# Altium PCB FT231X_BRK.PcbDoc
Units mm, origin at the board's own origin, x right, y up, seen from the top; angles counter-clockwise.
Board outline 18.8 x 29 mm, 2 copper layers (Top Layer, Bottom Layer); 19 components, 22 nets, 79 pads, 27 vias.
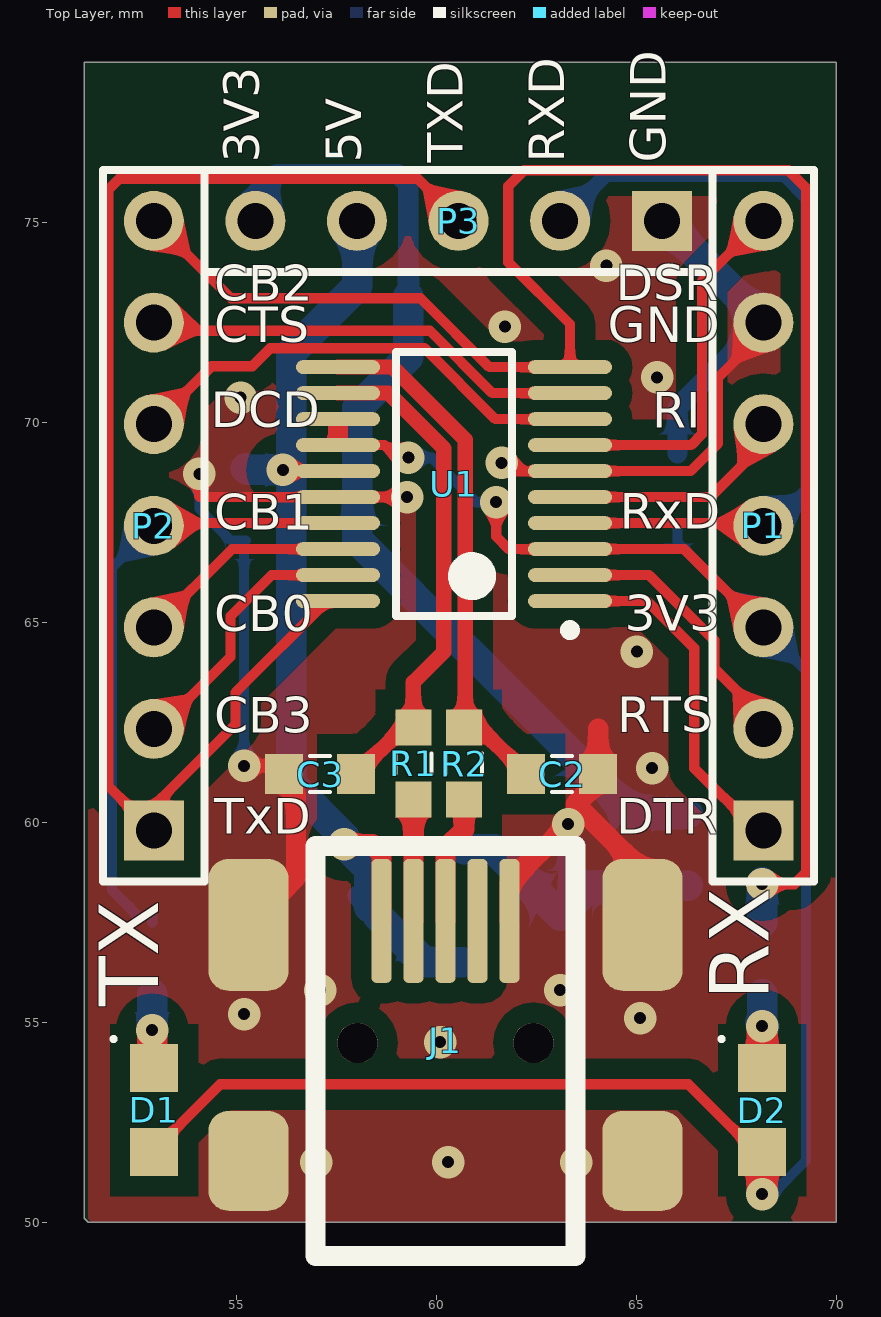
[diagram p0: Top Layer view]
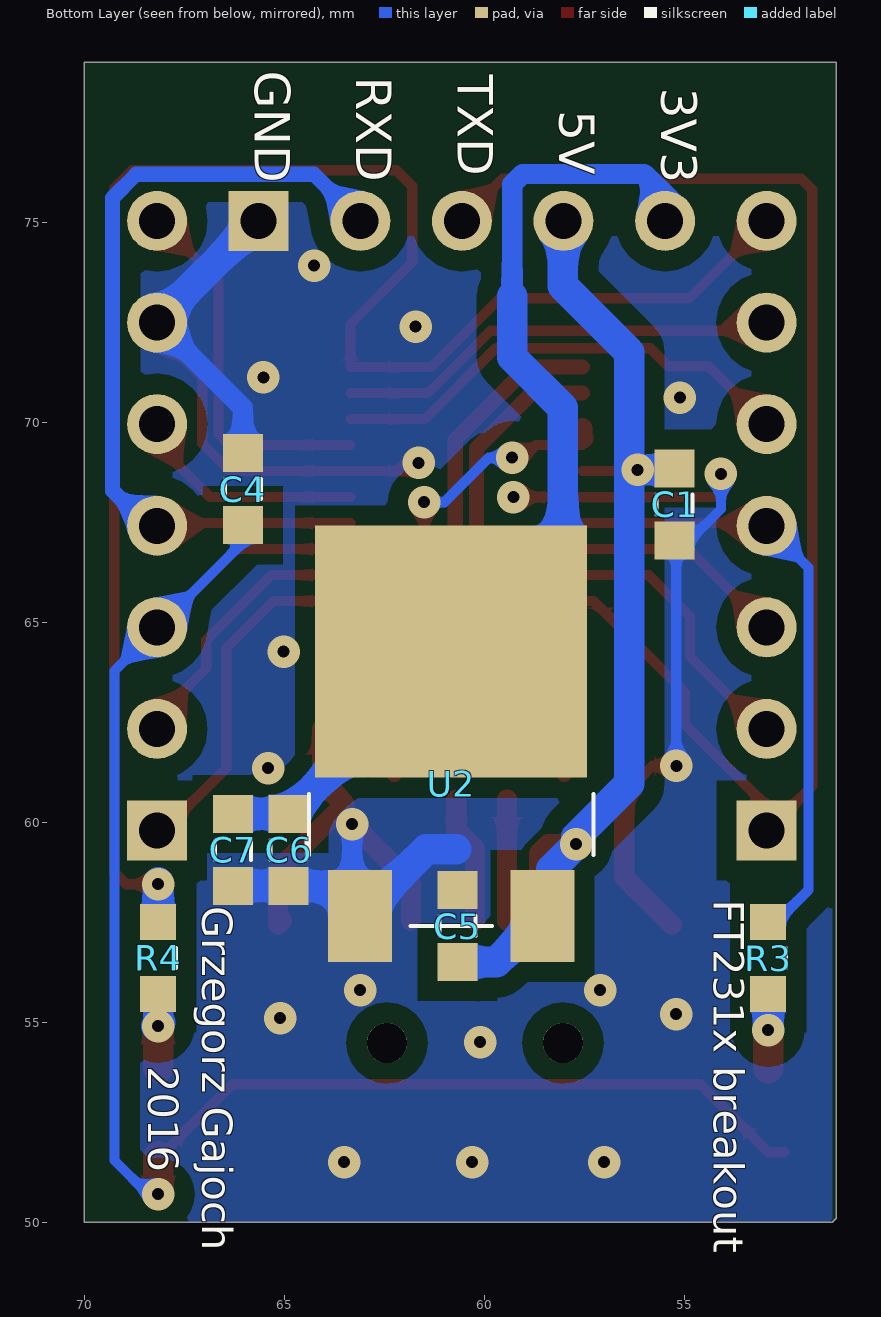
[diagram p1: Bottom Layer view, seen from below]
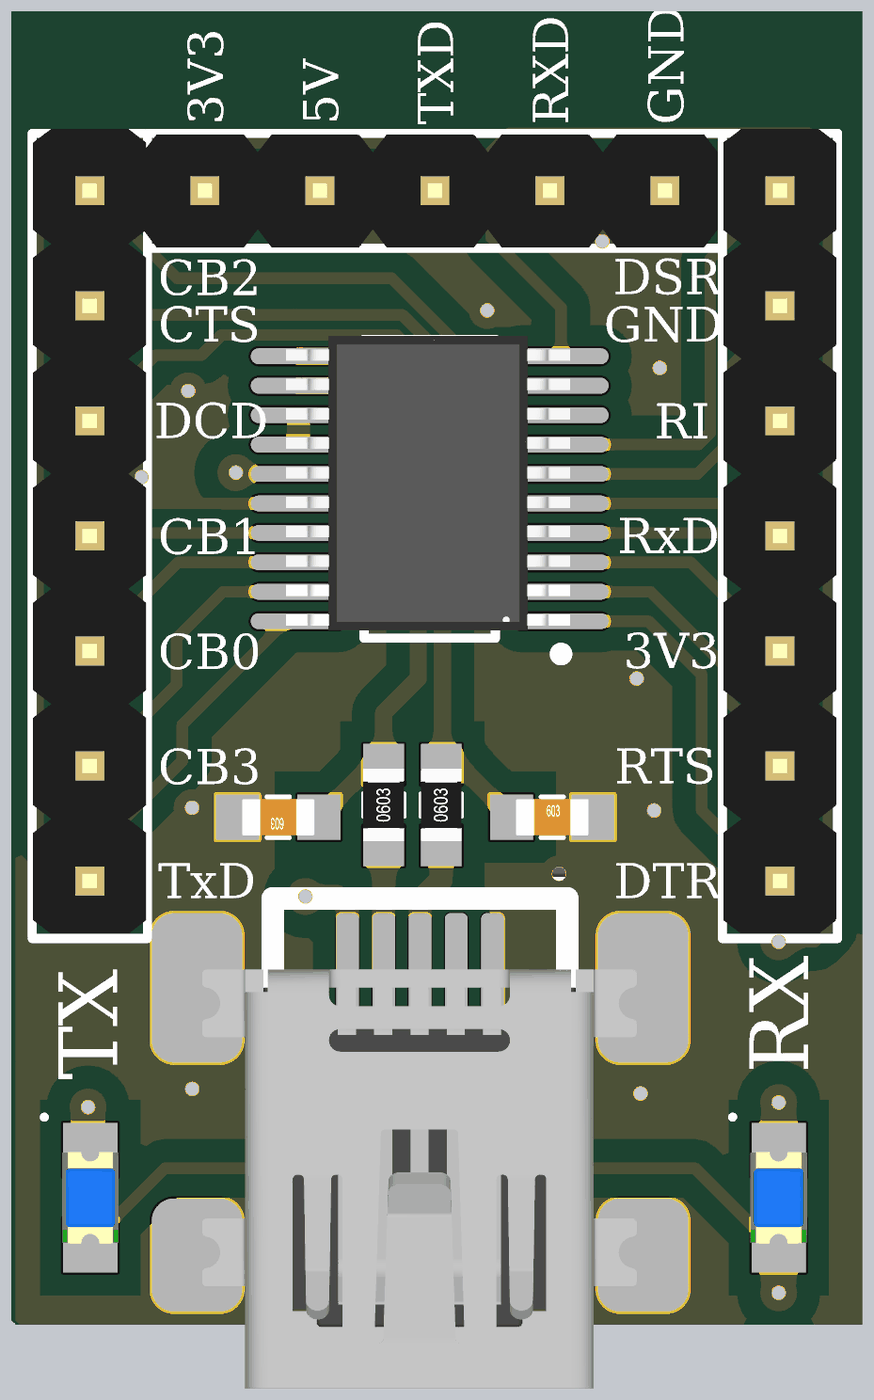
[diagram p2: 3D render of the assembled board from above, using the file's embedded part models]
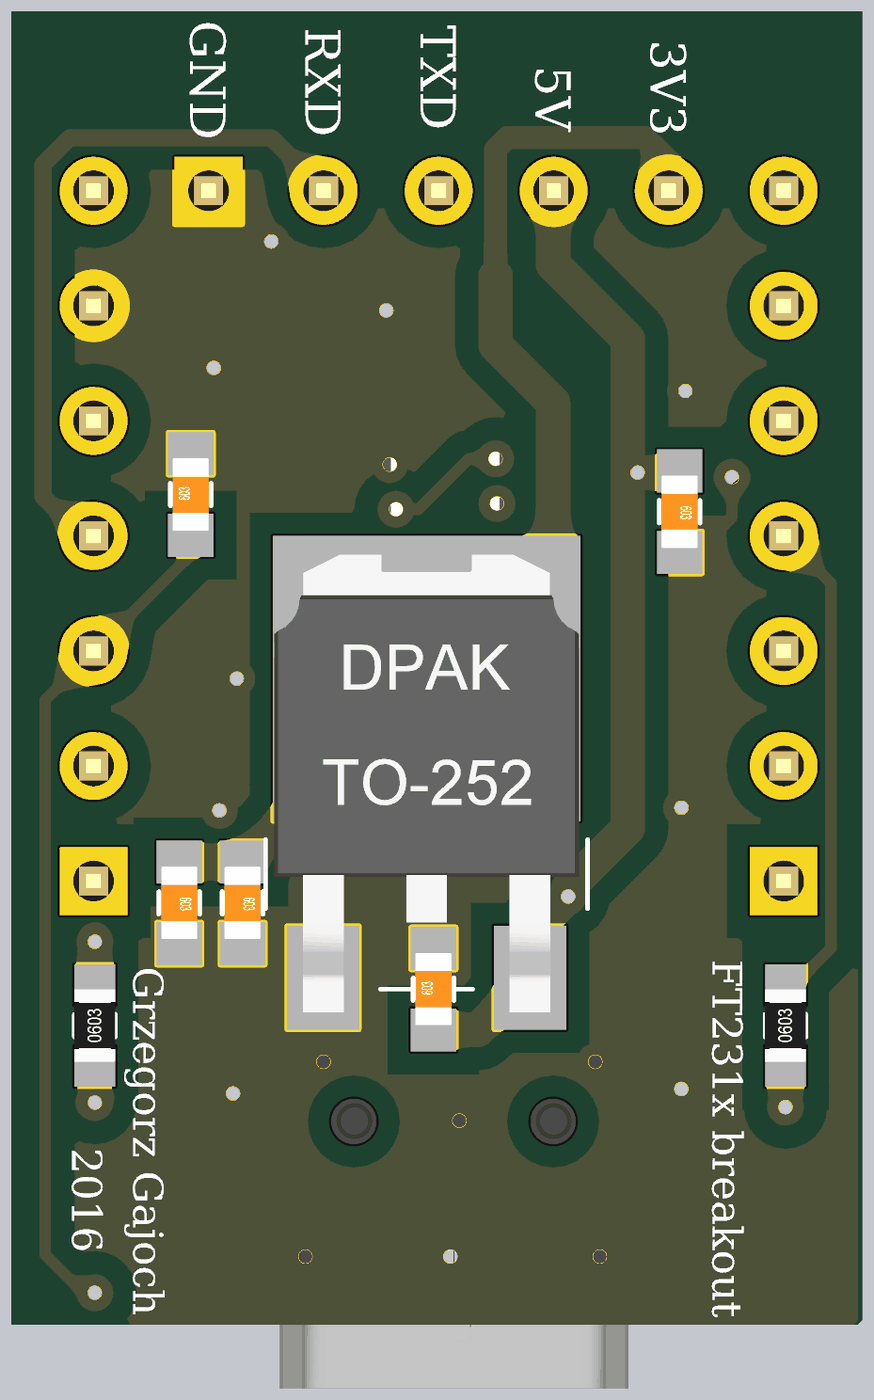
[diagram p3: 3D render of the assembled board from below, using the file's embedded part models]

## Layer stack, top to bottom
Top Solder: solder mask 0.0102, Solder Resist, Dk 3.5
Top Layer: signal copper 0.0356
Dielectric 1: dielectric 0.32, FR-4, Dk 4.8
Bottom Layer: signal copper 0.0356
Bottom Solder: solder mask 0.0102, Solder Resist, Dk 3.5

## Board outline
51.3,50 51.2,50.1 51.2,79 70,79 70,50

## Design rules (kind name [scope] priority, off if disabled: settings)
Clearance [All] p1: gap=0.152 except(0.508: Arc-Poly Track-Poly SMDPad-Poly THPad-Poly Via-Poly Fill-Poly Poly-Poly Poly-Region Poly-Text)
MinimumSolderMaskSliver [All] p1: minsoldermaskwidth=0.152
PolygonConnect [All] p1: connectstyle=Direct reliefconductorwidth=0.254 reliefentries=4 polygonreliefangle="90 Angle" airgapwidth=0.254
RoutingVias [All] p1: holewidth=0.3 width=0.813 viastyle="Through Hole" minholewidth=0.3 minwidth=0.813 maxholewidth=0.3 maxwidth=0.813
SilkToSilkClearance [All] p1: silktosilkclearance=0.025
SilkToSolderMaskClearance [IsPad] p1: minsilkscreentomaskgap=0.025 clearancetoexposedcopper=TRUE
SolderMaskExpansion [All] p1: expansion=0.051
Width [All] p1: maxlimit=2.54 minlimit=0.203 preferedwidth=0.254 minimp=50.000000 maximp=50.000000 favimp=50.000000
27 further rules are at their usual default settings.

## Components (designator, comment, footprint, x,y, rotation, side; value= is the part's Value field where it differs from the comment)
C1 "1u" C0603 55.237,67.945 r270 bottom
C2 "47p" C0603 63.15,61.2 r0 top
C3 "47p" C0603 57.1,61.2 r180 top
C4 "100n" C0603 66.032,68.326 r90 bottom
C5 "100n" C0603 60.673,57.404 r90 bottom
C6 "100n" C0603 64.889,59.309 r270 bottom
C7 "100n" C0603 66.286,59.309 r270 bottom
D1 "LEDX" "LED 0805 Blue" 52.95,52.8 r90 top
D2 "LEDX" "LED 0805 Blue" 68.15,52.8 r90 top
J1 "USB_MINI_B" USB_Mini_B_9.3x7.7 58.631,57.408 r90 top
P1 "Header 7" "HEADER 1X7 MALE" 68.178,59.792 r90 top
P2 "Header 7" "HEADER 1X7 MALE" 52.938,59.792 r90 top
P3 "Header 5" "HEADER 1X5 MALE" 65.638,75.032 r180 top
R1 "27R" 0603 59.428,61.468 r90 top
R2 "27R" 0603 60.698,61.468 r90 top
R3 "R" 0603 52.9,56.6 r90 bottom
R4 "R" 0603 68.15,56.6 r90 bottom
U1 "FT231XS" SSOP20_M 60.444,68.453 r180 top
U2 "LD1117" TO-252 60.825,67.564 r180 bottom

## Footprints (in the part's own frame and the unit in brackets; to place one, negate y for a bottom-side part, rotate by r counter-clockwise, add the part's x,y. Pads: shape width x height; smd on the part's side, far side on the other; paste and mask are expansions set on the pad)
0603 [mm] "SMD Resistor, Inch 0603, Metric 1608."
  rect 0.9x0.9 smd: 1(-0.9,0) 2(0.9,0)
  silkscreen extent -0.25,-0.45 0.25,0.45, body extent -0.8,-0.45 0.8,0.45, height 0.5
C0603 [mm] "SMD Capacitor, Inch 0603, Metric 1608."
  rect 0.95x1 smd: 1(-0.9,0) 2(0.9,0)
  silkscreen extent -0.25,-0.45 0.25,0.45, body extent -0.8,-0.4 0.8,0.4, height 0.3
"HEADER 1X5 MALE" [mm] "Connector; Header; 5 Position, Male"
  rect 1.5x1.5 hole 0.9: 1(0,0)
  round 1.5 hole 0.9: 2(2.54,0) 3(5.08,0) 4(7.62,0) 5(10.16,0)
  silkscreen extent -1.27,-1.27 11.43,1.27, body extent -1.17,-1.25 11.53,1.25, height 8.2
"HEADER 1X7 MALE" [mm] "Connector; Header; 7 Position; Male"
  rect 1.5x1.5 hole 0.9: 1(0,0)
  round 1.5 hole 0.9: 2(2.54,0) 3(5.08,0) 4(7.62,0) 5(10.16,0) 6(12.7,0) 7(15.24,0)
  silkscreen extent -1.27,-1.27 16.51,1.27, body extent -1.17,-1.25 16.61,1.25, height 8.2
"LED 0805 Blue" [mm]
  rect 1.2x1.2 smd: 1(-1.05,0) 2(1.05,0)
  silkscreen extent 1.73,0.97 1.83,1.07, body extent -1.01,-0.62 1.01,0.63, height 1.1
SSOP20_M [mm] "SSOP, 20-Leads, Body 6.6x4.5mm, Pitch 0.65mm, IPC Low Density"
  oval 2.1x0.35 smd: 1(-2.9,2.925) 2(-2.9,2.275) 3(-2.9,1.625) 4(-2.9,0.975) 5(-2.9,0.325) 6(-2.9,-0.325) 7(-2.9,-0.975) 8(-2.9,-1.625) 9(-2.9,-2.275) 10(-2.9,-2.925) 11(2.9,-2.925) 12(2.9,-2.275) 13(2.9,-1.625) 14(2.9,-0.975) 15(2.9,-0.325) 16(2.9,0.325) 17(2.9,0.975) 18(2.9,1.625) 19(2.9,2.275) 20(2.9,2.925)
  silkscreen extent -3.03,-3.3 1.45,3.77, body extent -3.1,-3.38 3.18,3.12
TO-252 [mm] "JEDEC standard. TO-252, variant AA."
  rect 1.6x2.3 smd: 1(-2.286,-9.906) 3(2.286,-9.906)
  rect 6.8x6.3 smd: 4(0,-3.302)
  silkscreen extent -3.56,-10.16 3.56,-6.86, body extent -3.37,-10.67 3.37,-0.57, height 2.37
USB_Mini_B_9.3x7.7 [mm] "Mini USB Connector, 9.3x7.7mm, SMT, Righer Angle"
  rrect50% 3.1x0.5 smd mask+0.025: 1(0.125,0) 2(0.125,-0.8) 3(0.125,-1.6) 4(0.125,-2.4) 5(0.125,-3.2)
  rrect50% 2.5x2 smd: MH1(-5.875,-6.525) MH4(-5.875,3.325)
  rrect50% 3.3x2 smd: MH2(0.025,-6.525) MH3(0.025,3.325)
  round 1 hole 1 unplated: X(-2.925,-3.8) Y(-2.925,0.6)
  silkscreen extent -8.25,-4.85 2,1.65, body extent -8.82,-6.39 0.43,3.21, height 4.05

## Part data
C1 C2 C3 C4 C5 C6 C7: library part Cap, "Generic capacitor"
D1 D2: "Typical LED"
J1: library part USB_MINI_B2, "USB On-The-Go (OTG) Mini-B Receptacle"
P1 P2: "Header, 7-Pin"
P3: "Header, 5-Pin"
R1 R2 R3 R4: library part Res, "Generic resistor"
U1: "USB to Full-Handshake UART Interface Chip, UHCI/OHCI/EHCI Compatible, USB 2.0 Compatible, -40 to +85 degC, 20-Pin SSOP, Pb-Free, Tube"
U2: "Low drop positive voltage regulator"

## Via types
v1: diameter 0.813, hole 0.3, Top Layer to Bottom Layer, tented both sides, 27 vias

## Nets (pads, with @x,y where several pads share a name; then routed paths per layer and width w, separated by ;. In a path a pad name is that pad's centre, name@x,y a point inside that pad or via, vN(x,y) a via of type N, cw(c..) or ccw(c..) an arc to the next point about the centre after c; other vN are vias at no path point)
3V3: C4.1 D1.1 D2.1 P1.3 U1.3 U1.13 U1.14 | length 49.9
  Top Layer w0.254: D1.1@52.5,51.75 52.9,51.75 54.6,53.45 66.3,53.45 D2.1@68.1,51.65 ; U1.14 58.707,69.428 59.022,69.113 v1(59.301,69.113) ; v1(61.5,68) 61.5,67.143 61.815,66.828 U1.3 66.202,66.828 P1.3@68.15,64.88
  Top Layer w0.508: U1.14@57.523,69.596 57.544,69.617 57.544,69.85
  Top Layer w0.762: v1(68.15,50.7) D2.1@68.15,51.65
  Bottom Layer w0.254: v1(59.301,69.113) 59.887,69.113 61,68 v1(61.5,68) ; C4.1 66.032,66.998 69.245,63.785 69.245,51.545 68.4,50.7 v1(68.15,50.7)
3V3_REG: C6.1 C7.1 P3.5 U2.4 | length 24.6
  Bottom Layer w0.508: P3.5@55.491,75.692 56.005,76.206 59.041,76.206 59.301,75.946 59.301,73.152
  Bottom Layer w0.762: 59.301,73.152 59.301,71.628 58.031,70.358 58.031,67.056 U2.4 60.836,64.262 C6.1 C7.1
5V: C1.1 C5.1 J1.1 P3.4 U1.15 U2.3 | length 27
  Top Layer w0.254: v1(56.164,68.809) 56.195,68.778 U1.15
  Top Layer w0.508: v1(57.7,59.45) 58.398,59.45 58.631,59.217 J1.1
  Bottom Layer w0.508: U2.3@58.031,58.166 58.323,57.874 U2.3
  Bottom Layer w0.762: C1.1 55.273,68.809 v1(56.164,68.809) ; P3.4@58.031,75.057 58.031,73.406 56.38,71.755 56.38,60.96 57.7,59.64 v1(57.7,59.45) 58.323,58.827 U2.3@58.323,57.874 ; U2.3 59.693,56.504 C5.1
CBUS0: P2.3 U1.18 | length 5.8
  Top Layer w0.254: P2.3@52.57,64.897 52.964,64.897 54.895,66.828 U1.18
CBUS1: P2.4 R3.2 U1.17 | length 15.5
  Top Layer w0.254: P2.4@52.57,67.437 52.611,67.478 U1.17
  Bottom Layer w0.254: R3.2@52.5,57.7 51.897,58.303 51.897,66.37 52.57,67.043 P2.4@52.57,67.437 ; R3.2 R3.2@52.9,57.7
CBUS2: P2.7 R4.2 U1.10 | length 44.6
  Top Layer w0.254: P2.7@52.57,75.057 52.913,75.057 P2.7 54.87,73.1 59.607,73.1 61.329,71.378 U1.10 63.344,72.456 61.8,74 61.8,75.9 62.2,76.3 68.8,76.3 69.25,75.85 69.25,58.75 68.95,58.45 v1(68.15,58.45)
  Bottom Layer w0.762: R4.2 v1(68.15,58.45) v1@68.15,58.5
CBUS3: P2.2 U1.19 | length 7.2
  Top Layer w0.254: P2.2@52.57,62.357 53.078,62.357 54.856,64.135 54.856,65.151 55.883,66.178 U1.19
CTS: P2.6 U1.9 | length 11.5
  Top Layer w0.254: P2.6@52.57,72.517 52.799,72.288 59.844,72.288 61.404,70.728 U1.9
DCD: P2.5 U1.8 | length 12.3
  Top Layer w0.254: P2.5@52.57,69.977 52.964,69.977 54.387,71.4 55.4,71.4 55.848,71.848 59.71,71.848 61.48,70.078 U1.8
DSR: P1.7 U1.7 | length 9.7
  Top Layer w0.254: U1.7 66.372,69.428 66.642,69.698 66.642,73.532 68.167,75.057 P1.7@68.445,75.057
DTR: P1.1 U1.1 | length 9.2
  Top Layer w0.254: U1.1 65.274,65.528 66.45,64.352 66.45,61.35 67.983,59.817 P1.1@68.445,59.817
GND: C1.2 C2.2 C3.2 C4.2 C5.2 C6.2 C7.2 J1.5 J1.MH1 J1.MH2 J1.MH3 J1.MH4 P1.6 P3.1 U1.6 U1.16 U2.1 | length 54.6
  Top Layer w0.254: v1(54.081,68.707) 54.081,68.128 55.875,68.128 55.88,68.123 57.539,68.123 U1.16 v1(59.27,68.128) ; v1(55.198,61.41) 55.792,61.41 C3.2@56.496,60.706 ; v1(61.638,68.986) 61.846,68.778 U1.6 66.357,68.778 67.048,69.469 67.048,71.12 P1.6@68.445,72.517
  Top Layer w0.508: J1.MH3 56.496,58.623 C3.2@56.496,60.706 ; J1.5 61.831,58.481 v1(63.3,59.95) 63.492,60.142 63.492,60.452 ; 64.05,62.343 C2.2 64.05,61.01 63.492,60.452 ; J1.MH2@65.056,57.533 J1.MH2 65.156,58.788 63.492,60.452
  Bottom Layer w0.254: v1(54.081,68.707) 54.081,67.831 54.867,67.045 C1.2 55.198,67.006 v1(55.198,61.41)
  Bottom Layer w0.508: U2.1 63.3,57.847 v1(63.3,59.95) ; C4.2 66.032,70.358 P1.6@68.191,72.517
  Bottom Layer w0.762: 60.698,59.32 61.449,59.32 U2.1 ; U2.1@63.3,57.847 63.862,58.409 C6.2 C7.2 ; P3.1@65.651,75.057 P1.6@68.191,72.517
  other v1: 57,51.5 60.3,51.5 63.5,51.5 60.1,54.5 65.1,55.1 55.2,55.2 57.1,55.8 63.1,55.8 65.4,61.35 65.016,64.262 55.11,70.612 65.524,71.12 61.714,72.39 64.254,73.914
NetC2_1: C2.1 R2.2 U1.11 | length 13.2
  Top Layer w0.381: U1.11 58.908,71.378 60.723,69.563 60.723,62.393 R2.2 ; R2.2@60.716,62.35 R2.2 ; C2.1 61.082,62.368 R2.2
NetC3_1: C3.1 R1.2 U1.12 | length 12.7
  Top Layer w0.381: U1.12 58.804,70.728 60.19,69.342 60.19,64.262 59.428,63.5 R1.2 ; C3.1 R1.2@59.15,62.35 ; R1.2@59.15,62.35 59.41,62.35 R1.2 ; R1.2@59.15,62.35 59.168,62.368 R1.2
NetD1_2: D1.2 R3.1 | length 1.8
  Top Layer w0.762: D1.2@52.9,53.85 v1(52.9,54.8)
  Bottom Layer w0.762: v1(52.9,54.8) R3.1
NetD2_2: D2.2 R4.1 | length 1.9
  Top Layer w0.762: D2.2 v1(68.15,54.9)
  Bottom Layer w0.762: v1@68.1,55 v1@68.2,54.9 ; v1@68.15,55 R4.1
NetJ1_2: J1.2 R1.1 | length 3
  Top Layer w0.508: R1.1 59.431,60.565 J1.2
NetJ1_3: J1.3 R2.1 | length 3.2
  Top Layer w0.508: J1.3 60.231,59.35 60.698,59.817 R2.1
RI: P1.5 U1.5 | length 6.2
  Top Layer w0.254: U1.5 66.85,68.128 68.15,69.428 68.15,69.96 68.167,69.977 P1.5@68.445,69.977
RTS: P1.2 U1.2 | length 7.1
  Top Layer w0.254: U1.2 65.322,66.178 66.95,64.55 66.95,63.852 P1.2@68.445,62.357
RXD: P1.4 P3.2 U1.4 | length 20.5
  Top Layer w0.254: U1.4 68.404,67.478 P1.4@68.445,67.437
  Bottom Layer w0.381: P3.2@63.111,75.057 64.254,76.2 68.7,76.2 69.296,75.604 69.296,68.288 P1.4@68.445,67.437
TXD: P2.1 P3.3 U1.20 | length 33
  Top Layer w0.254: U1.20 57.265,65.528 54.983,63.246 54.983,62.446 52.621,60.084 51.8,60.905 51.8,75.811 52.075,76.086 59.542,76.086 P3.3@60.571,75.057
pads on no net: J1.4 J1.X J1.Y

## Polygon pours and split planes (outlines as drawn)
GND on Top Layer "GND_L01_P000" (solid, remove dead copper, pour order 0): 51.3,50 51.3,79 70,79 70,50
GND on Bottom Layer "GND_L02_P002" (solid, remove dead copper, pour order 2): 70,50 51.3,50 51.3,79 70,79

## Silkscreen, mask and mechanical layers (free items; w line width, h text height)
Top Overlay:
  text "3V3" at 55.879,76.49 h1.52 r90
  text "5V" at 58.421,76.49 h1.52 r90
  text "TXD" at 60.959,76.49 h1.52 r90
  text "RXD" at 63.499,76.49 h1.52 r90
  text "GND" at 66.043,76.49 h1.52 r90
  text "DSR" at 64.491,72.75 h1.52
  text "CB2" at 54.445,72.731 h1.52
  text "CTS" at 54.45,71.7 h1.52
  text "GND" at 64.287,71.699 h1.52
  text "DCD" at 54.361,69.571 h1.52
  text "RI" at 65.405,69.56 h1.52
  text "RxD" at 64.591,67.032 h1.52
  text "CB1" at 54.445,67.014 h1.52
  text "3V3" at 64.717,64.492 h1.52
  text "CB0" at 54.445,64.474 h1.52
  text "RTS" at 64.522,61.945 h1.52
  text "CB3" at 54.445,61.934 h1.52
  text "TxD" at 54.445,59.412 h1.52
  text "DTR" at 64.506,59.412 h1.52
  text "RX" at 68.8,55.55 h2.54 r90
  text "TX" at 53.54,55.4 h2.54 r90
Bottom Overlay:
  text "GND" at 66.043,78.792 h1.52 r90
  text "TXD" at 60.959,78.693 h1.52 r90
  text "RXD" at 63.499,78.637 h1.52 r90
  text "3V3" at 55.879,78.364 h1.52 r90
  text "5V" at 58.421,77.795 h1.52 r90
  text "FT231x breakout" at 54.513,58.064 h1.3 r90
  text "Grzegorz Gajoch" at 67.3,57.9 h1.3 r90
  text "2016" at 68.65,53.9 h1.3 r90
Mechanical 1:
  lines w0.127: 51.2,50 51.2,79 70,79 70,50 51.2,50